# Altium PCB Led_orb.PcbDoc
Units mil, origin at the board's own origin, x right, y up, seen from the top; angles counter-clockwise.
Board outline 2362.2 x 2362.2 mil, 2 copper layers (Top Layer, Bottom Layer), stack 65.792 mil thick; 48 components, 29 nets, 155 pads, 17 vias.
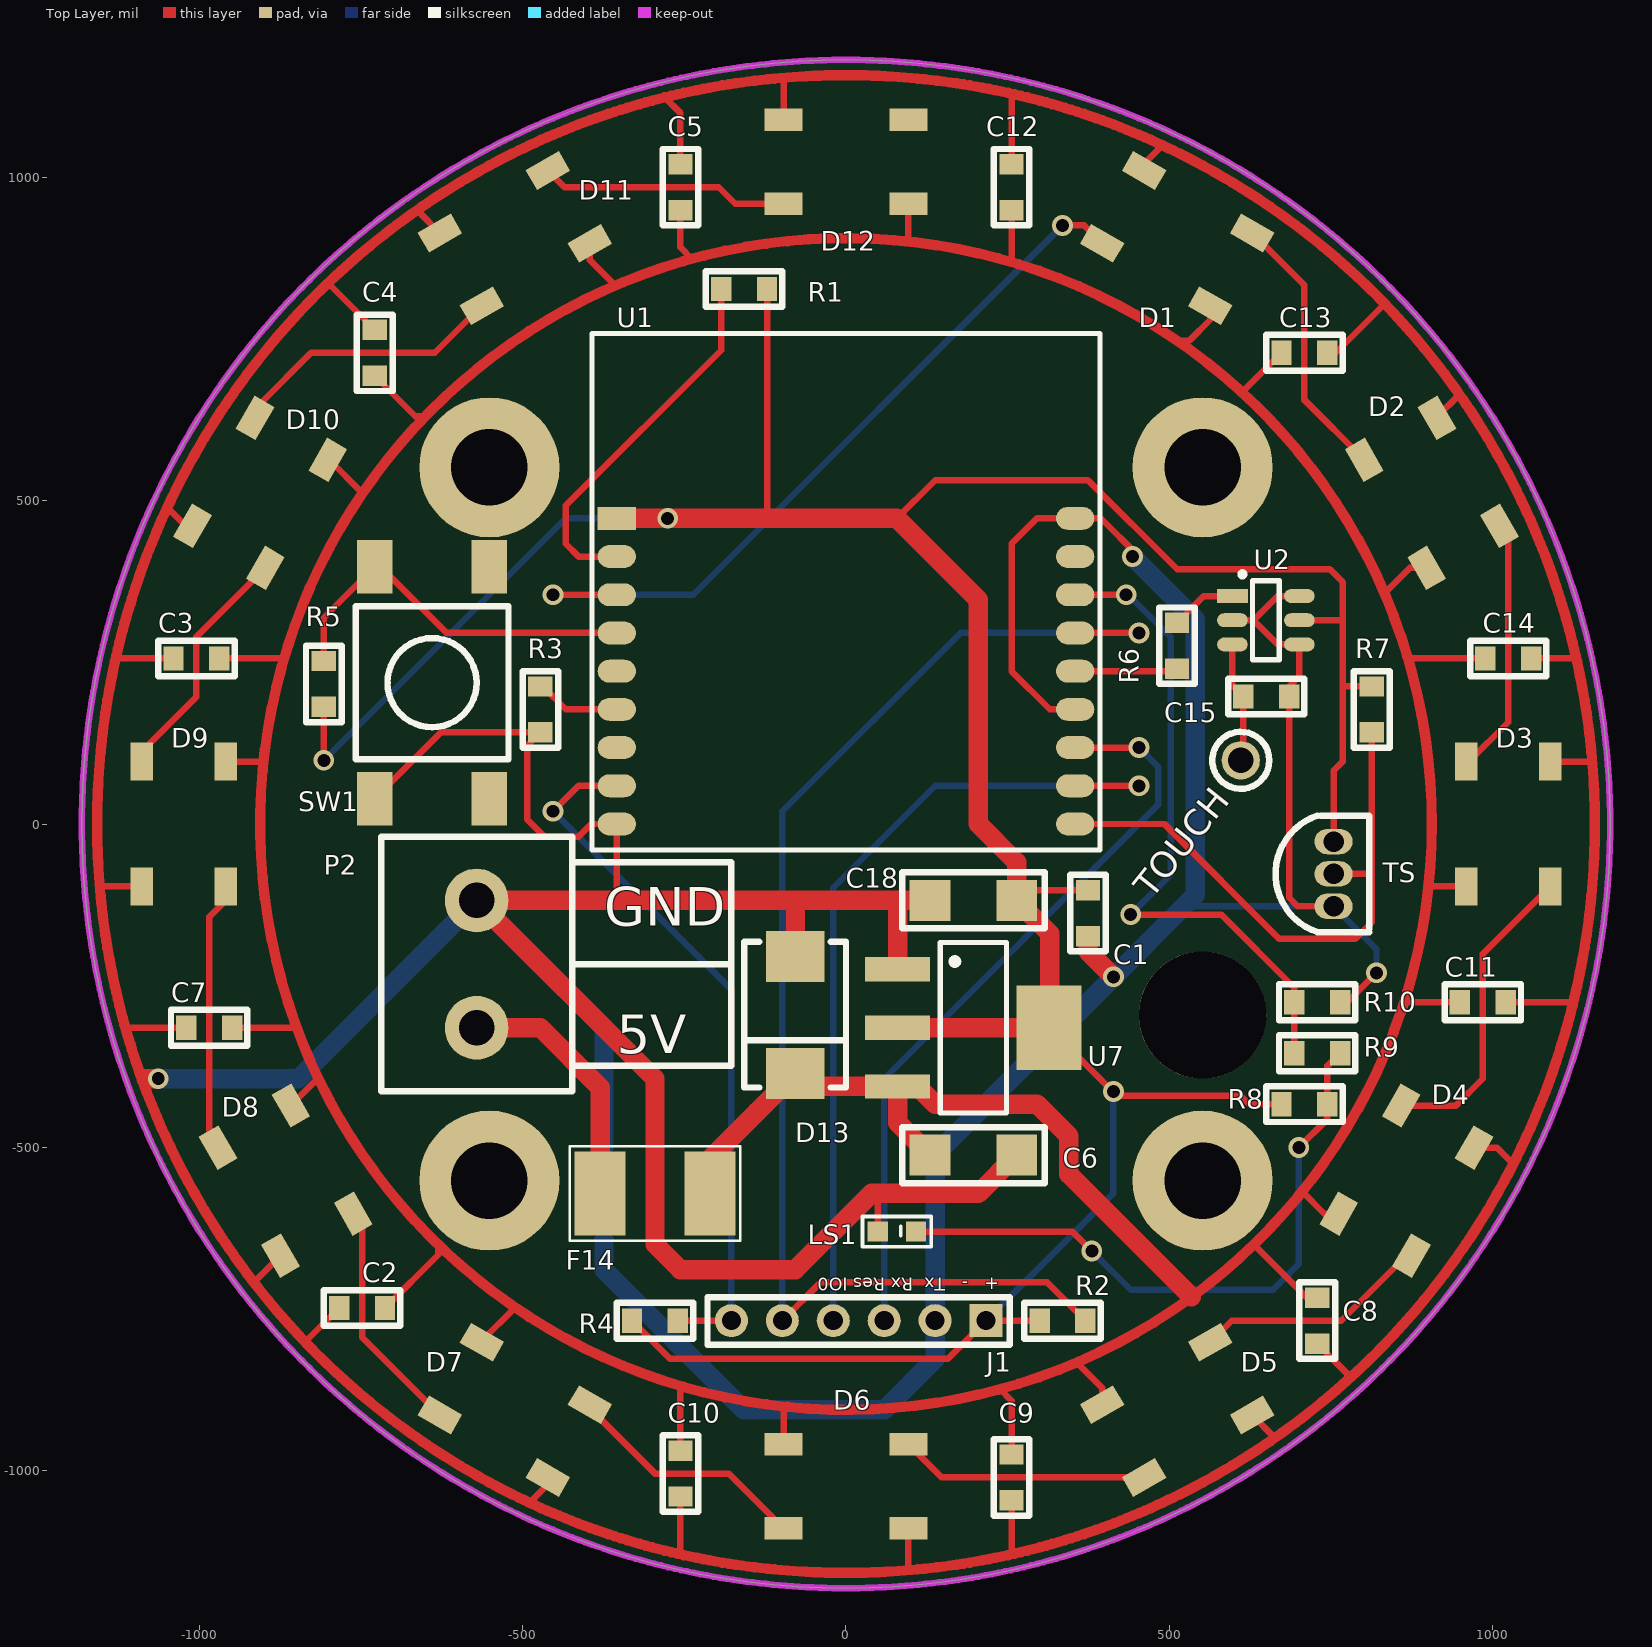
[diagram p0: Top Layer view]
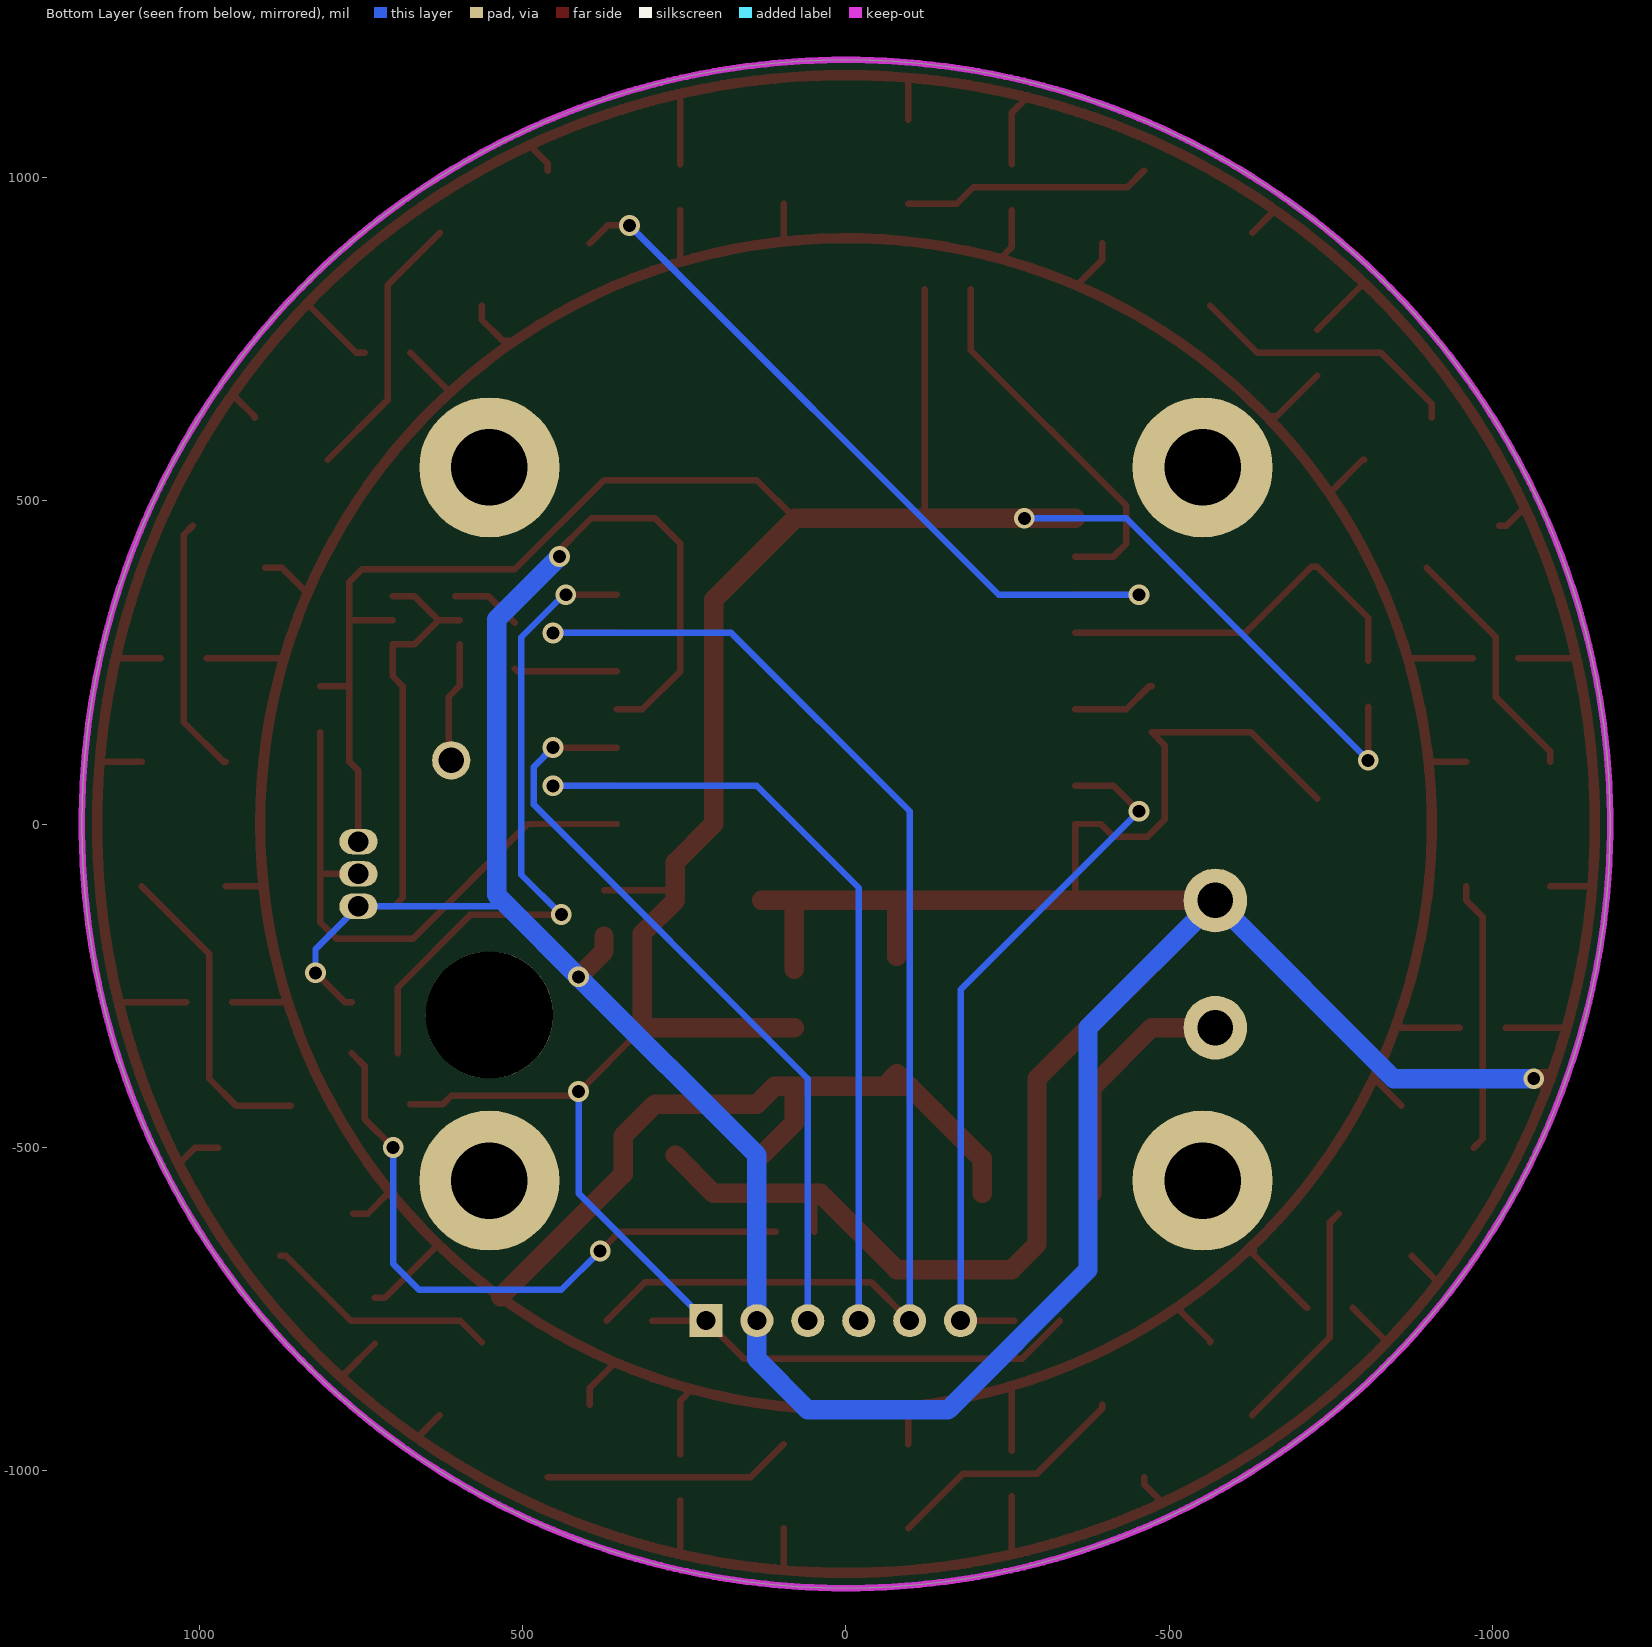
[diagram p1: Bottom Layer view, seen from below]
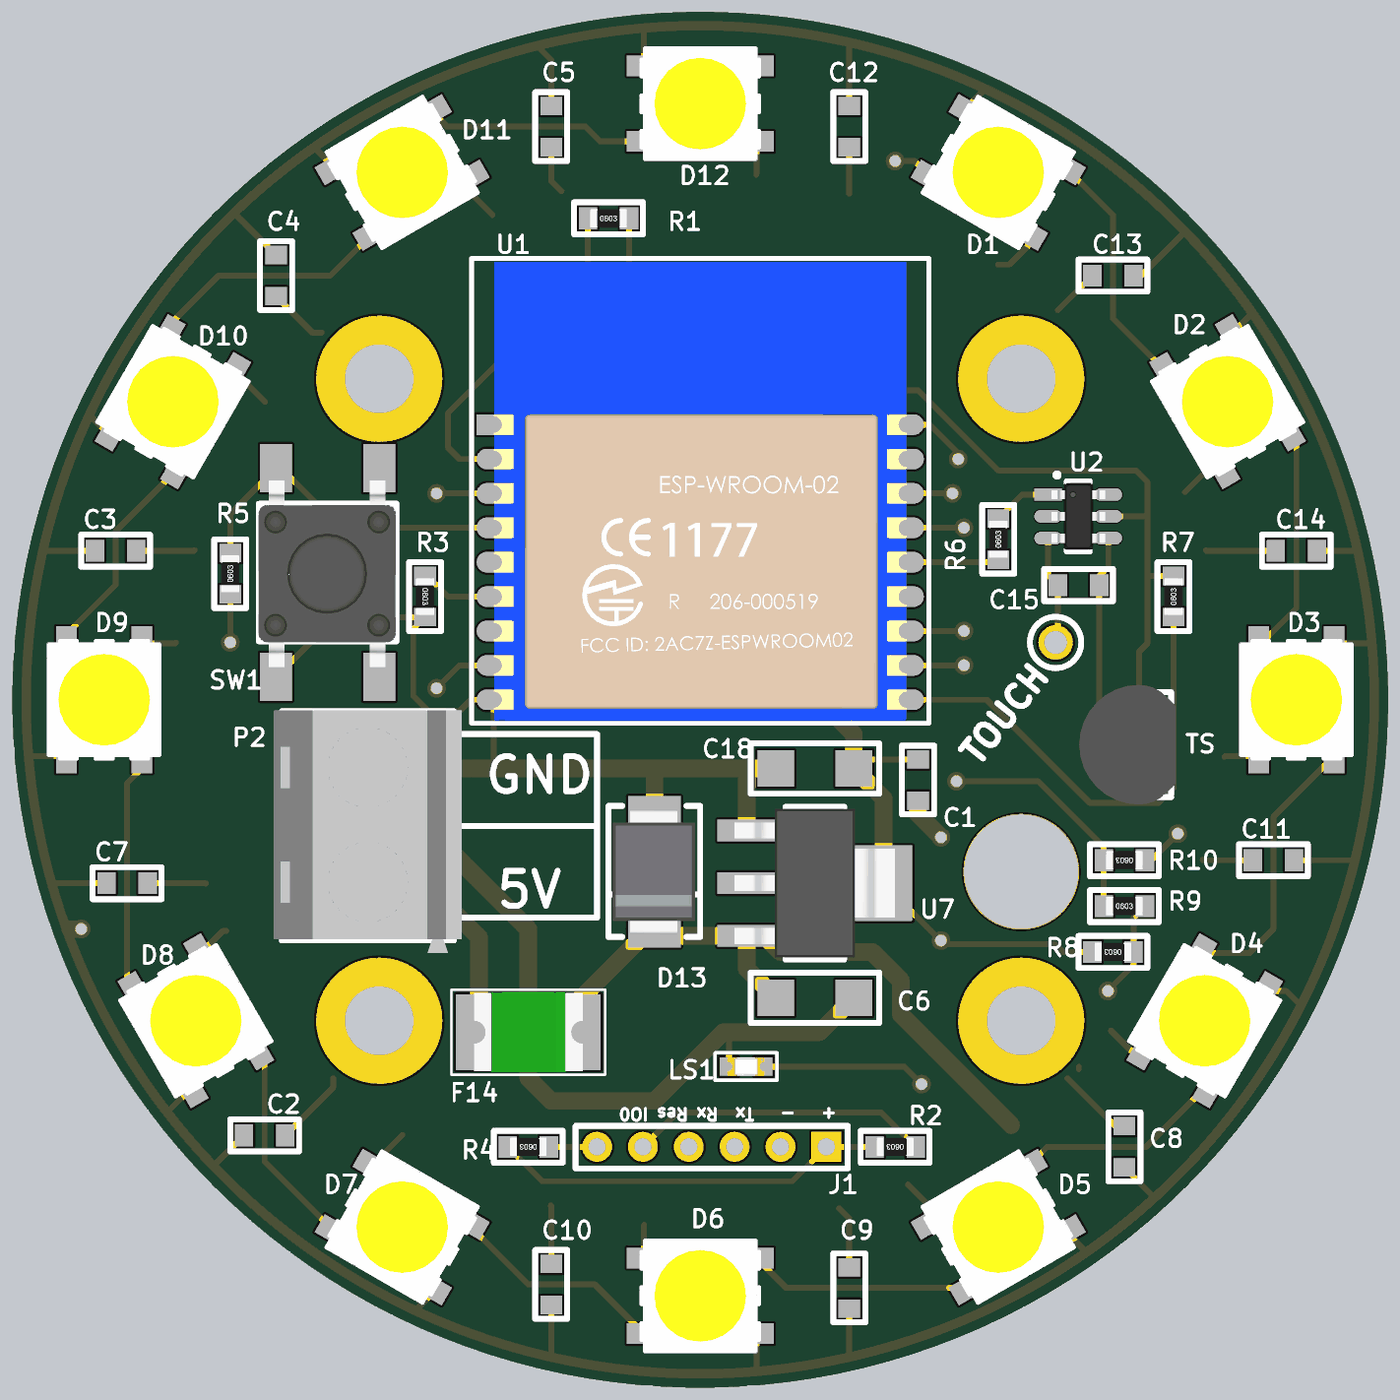
[diagram p2: 3D render of the assembled board from above, using the file's embedded part models]

## Layer stack, top to bottom
Top Solder: solder mask 0.4, Solder Resist, Dk 3.5
Top Layer: signal copper 1.4
Dielectric1: core 62.9921, FR-4, Dk 4.8
Bottom Layer: signal copper 1.4
Bottom Solder: solder mask 0.4, Solder Resist, Dk 3.5

## Board outline
0,-1181.1 cw(c0,0) -1181.1,0 cw(c0,0) 0,1181.1 cw(c0,0) 1181.1,0 cw(c0,0)

## Design rules (kind name [scope] priority, off if disabled: settings)
Clearance Clearance_to_poly [All vs (InNamedPolygon('Bottom GND'))] p1: gap=20
Clearance Clearance_uc [HasFootprint('LQFP64')] p2: gap=4
Clearance [All] p3: gap=9
HoleSize [All] p1: absolutevalues=TRUE maxlimit=236.22 minlimit=0.98 maxpercent=80.000 minpercent=20.000
MinimumSolderMaskSliver MinimumSolderMaskSliver_uc [HasFootprint('LQFP64')     or    HasFootprint('GATE_SOT363') vs HasFootprint('LQFP64')     or    HasFootprint('GATE_SOT363')] p1: minsoldermaskwidth=0
MinimumSolderMaskSliver [All] p2: minsoldermaskwidth=10
PolygonConnect [All] p1: connectstyle=Relief reliefconductorwidth=10 reliefentries=4 polygonreliefangle="90 Angle" airgapwidth=10
RoutingVias [All] p1: holewidth=16 width=32 viastyle="Through Hole" minholewidth=16 minwidth=32 maxholewidth=28 maxwidth=50
SilkToSilkClearance [All] p1: silktosilkclearance=0
SilkToSolderMaskClearance SilkscreenOverComponentPads [IsPad] p1: minsilkscreentomaskgap=0 clearancetoexposedcopper=TRUE
SolderMaskExpansion [All] p1: expansion=4
Width [All] p1: maxlimit=40 minlimit=8 preferedwidth=10
26 further rules are at their usual default settings.

## Components (designator, comment, footprint, x,y, rotation, side; value= is the part's Value field where it differs from the comment)
C1 "100nF" FP_0603_CAP_080 374.02,-137.8 r90 top
C2 "100nF" FP_0603_CAP_080 -748.03,-748.03 r0 top
C3 "100nF" FP_0603_CAP_080 -1003.94,255.91 r0 top
C4 "100nF" FP_0603_CAP_080 -728.35,728.35 r270 top
C5 "100nF" FP_0603_CAP_080 -255.91,984.25 r270 top
C6 "10uF" FP_1206_CAP_085 196.85,-511.81 r180 top
C7 "100nF" FP_0603_CAP_080 -984.25,-314.96 r0 top
C8 "100nF" FP_0603_CAP_080 728.35,-767.72 r90 top
C9 "100nF" FP_0603_CAP_080 255.91,-1010 r90 top
C10 "100nF" FP_0603_CAP_080 -255.91,-1003.94 r90 top
C11 "100nF" FP_0603_CAP_080 984.25,-275.59 r180 top
C12 "100nF" FP_0603_CAP_080 255.91,984.25 r270 top
C13 "100nF" FP_0603_CAP_080 708.66,728.35 r180 top
C14 "100nF" FP_0603_CAP_080 1023.62,255.91 r180 top
C15 "22pF" FP_0603_CAP_080 649.61,196.85 r180 top
C18 "10uF" FP_1206_CAP_085 196.85,-118.11 r0 top
D1 "WS2812B" LED_5050_4pin 511.81,905.51 r150 top
D2 "WS2812B" LED_5050_4pin 905.51,511.81 r120 top
D3 "WS2812B" LED_5050_4pin 1023.62,0 r90 top
D4 "WS2812B" LED_5050_4pin 866.14,-551.18 r60 top
D5 "WS2812B" LED_5050_4pin 511.81,-905.51 r30 top
D6 "WS2812B" LED_5050_4pin 0,-1023.62 r0 top
D7 "WS2812B" LED_5050_4pin -511.81,-905.51 r330 top
D8 "WS2812B" LED_5050_4pin -866.14,-551.18 r300 top
D9 "WS2812B" LED_5050_4pin -1023.62,0 r270 top
D10 "WS2812B" LED_5050_4pin -905.51,511.81 r240 top
D11 "WS2812B" LED_5050_4pin -511.81,905.51 r210 top
D12 "WS2812B" LED_5050_4pin 0,1023.62 r180 top
D13 "SMBJ5.0A suppressor" "FP_SMB DO214AA" -78.74,-295.28 r270 top
F14 "fuse 1.1A" Fuse-Littlefuse-1812 -295.28,-570.87 r270 top
J1 "ESP_PROG_MINI" ESP_PROG_MINI 216.54,-767.72 r180 top
LS1 "ALS-PT19" ALS-PT19 78.74,-629.92 r0 top
P2 "Sorkapocs_2" Sorkapocs_5mm_2P -570.87,-216.54 r270 top
R1 "10k" FP_0603_RES -157.48,826.77 r0 top
R2 "10k" FP_0603_RES 334.65,-767.72 r180 top
R3 "10k" FP_0603_RES -472.44,177.17 r270 top
R4 "10k" FP_0603_RES -295.28,-767.72 r180 top
R5 "1K" FP_0603_RES -807.09,216.54 r90 top
R6 "1K" FP_0603_RES 511.81,275.59 r90 top
R7 "10k" FP_0603_RES 812.72,177.17 r90 top
R8 "10k" FP_0603_RES 708.66,-433.07 r180 top
R9 "220k" FP_0603_RES 728.35,-354.33 r0 top
R10 "100k" FP_0603_RES 728.35,-275.59 r180 top
SW1 "SW_ tactile" FP_TACTBTN -728.35,39.37 r180 top
TS "DS18B20P" SENSOR_TO92 708.66,-177.17 r0 top
U1 "ESP8266_wroom02" ESP8266_wroom02 0,236.22 r0 top
U2 "TTP223E-BA6" SWITCH_SOT23-6 649.61,314.96 r0 top
U7 "LD1117xx" SUPPLY_SOT223 196.85,-314.96 r0 top

## Footprints (in the part's own frame and the unit in brackets; to place one, negate y for a bottom-side part, rotate by r counter-clockwise, add the part's x,y. Pads: shape width x height; smd on the part's side, far side on the other; paste and mask are expansions set on the pad)
ALS-PT19 [mm]
  rect 0.8x0.8 smd: 1(0.75,0) 2(-0.75,0)
  silkscreen extent -1.35,-0.6 1.34,0.6, body extent -0.8,-0.4 0.8,0.4, height 0.6
ESP8266_wroom02 [mm]
  rect 1.5x0.9 smd: 1(-9,6)
  oval 1.5x0.9 smd: 2(-9,4.5) 3(-9,3) 4(-9,1.5) 5(-9,0) 6(-9,-1.5) 7(-9,-3) 8(-9,-4.5) 9(-9,-6) 10(9,-6) 11(9,-4.5) 12(9,-3) 13(9,-1.5) 14(9,0) 15(9,1.5) 16(9,3) 17(9,4.5) 18(9,6)
  silkscreen extent -9.98,-7.02 9.97,13.25, body extent -9,-6.9 9,13.1, height 3
ESP_PROG_MINI [mm]
  rect 1.3x1.3 hole 0.75: 1(0,0)
  round 1.3 hole 0.75: 2(2,0) 3(4,0) 4(6,0) 5(8,0) 6(10,0)
  silkscreen extent -0.94,-0.91 10.94,0.94
FP_0603_CAP_080 [mm] "0.8mm magas 0603 kapacitás"
  rect 0.8x0.95 smd: 1(-0.9,0) 2(0.9,0)
  silkscreen extent -1.5,-0.7 1.5,0.7, body extent -0.8,-0.4 0.76,0.4, height 0.8
FP_0603_RES [mm] "0603 ellenállás"
  rect 0.8x0.95 smd: 1(-0.9,0) 2(0.9,0)
  silkscreen extent -1.5,-0.7 1.5,0.7, body extent -0.8,-0.4 0.8,0.4, height 0.44
FP_1206_CAP_085 [mm] "1206 kapacitás 0.85 mm"
  rect 1.6x1.6 smd: 1(-1.7,0) 2(1.7,0)
  silkscreen extent -2.8,-1.1 2.8,1.1, body extent -1.52,-0.79 1.58,0.79, height 0.85
"FP_SMB DO214AA" [mm] "DO214-AA tok (SMB)"
  rect 2x2.3 smd: A(-2.3,0) K(2.3,0)
  silkscreen extent -2.87,-2 2.84,2, body extent -2.7,-1.83 2.7,1.77, height 2.3
FP_TACTBTN [mm] "TE CONNECTIVITY / ALCOSWITCH - FSM2JSMA"
  rect 1.4x2.1 smd: 1(0,0) 2(0,-9.1) 3(-4.5,0) 4(-4.5,-9.1)
  silkscreen extent -5.25,-7.55 0.75,-1.55, body extent -5.23,-8.57 0.77,-0.42, height 5
Fuse-Littlefuse-1812 [mm]
  rect 3.3x2 smd: 1(0,2.154) 2(0,-2.154)
  silkscreen extent -1.85,-3.35 1.85,3.35, body extent -1.74,-2.36 1.74,2.37, height 1.03
LED_5050_4pin [mm]
  rect 1.5x0.9 smd: 1(-2.45,1.65) 2(-2.45,-1.65) 3(2.45,-1.65) 4(2.45,1.65)
  body extent -2.65,-2.5 2.65,2.5, height 1.6
SENSOR_TO92 [mm] "TO 92, min szélesség"
  oval 1.5x1 hole 0.8: 1(1.143,1.27) 2(1.143,2.54) 3(1.143,3.81)
  silkscreen extent -1.14,0.25 2.54,4.83, body extent -1.47,-0.07 2.73,5.15, height 10
Sorkapocs_5mm_2P [mm]
  round 2.5 hole 1.4: 1(-2.5,0) 2(2.5,0)
  silkscreen extent -5,-3.75 5,3.75, body extent -5.05,-4.1 5.55,4.1, height 10
SUPPLY_SOT223 [mm] "SOT223 package, 3 leads"
  rect 2.55x0.95 smd: 1(-2.975,2.3) 2(-2.975,0) 3(-2.975,-2.3)
  rect 2.55x3.3 smd: 2(2.975,0)
  silkscreen extent -1.3,-3.35 1.3,3.35, body extent -3.5,-3.25 3.5,3.25, height 1.65
SWITCH_SOT23-6 [mm] "SOT23, 5-Leads, Body 2.9x1.6mm, Pitch 0.95mm, Lead Span 2.8mm, IPC Medium Density"
  rect 1.2x0.55 smd mask+0.05: 1(-1.327,0.95)
  oval 1.2x0.55 smd mask+0.05: 2(-1.327,0) 3(-1.327,-0.95) 4(1.3,-0.95) 5(1.3,0) 6(1.3,0.95)
  silkscreen extent -1.01,-1.55 0.51,1.88, body extent -1.17,-1.46 1.17,1.46, height 1

## Part data
C1 C2 C3 C4 C5 C7 C8 C9 C10 C11 C12 C13 C14: library part CAP, "Capacitor"
C6 C18: library part Cap, "Capacitor ceramic X7R"
C15: library part Cap, "Capacitor"
D13: library part "Suppressor diode"
F14: library part FUSE, "fuse"
LS1: "ALS-PT19 Ambient Light Sensor"
P2: library part "Header 1X2", "Header, 2-Pin"
R1 R2 R3 R4 R7 R8 R9 R10: library part Res3, "Resistor"
R5 R6: library part RES, "Resistor"
U1: "ESP8266 WROOM 02 wifi module"
U2: "SOT-23-6 Touch Sensor Controller ICs RoHS"
U7: "LD1117xx 3,3V lin reg"

## Free pads (board coordinates)
  round 216.54 hole 118.11: 0(-551.18,-551.18) 0(-551.18,551.18) 0(551.18,-551.18) 0(551.18,551.18)
  round 196.85 hole 196.85: 0(551.18,-295.28)
  round 59.06 hole 39.37: 1(610.24,98.43)

## Via types
v1: diameter 32, hole 20, Top Layer to Bottom Layer, tented both sides, 17 vias

## Nets (pads, with @x,y where several pads share a name; then routed paths per layer and width w, separated by ;. In a path a pad name is that pad's centre, name@x,y a point inside that pad or via, vN(x,y) a via of type N, cw(c..) or ccw(c..) an arc to the next point about the centre after c; other vN are vias at no path point)
3V3: C1.2 C18.2 J1.1 R1.2 R2.2 R4.2 R5.1 R7.2 R8.2 TS.3 U1.1 U2.5 U7.2 | length 5605.8
  Top Layer w10: v1(-807.09,98.43) R5.1 ; R4.2 -271.65,-826.77 157.48,-826.77 J1.1 R2.2 ; -122.05,476.38 R1.2 ; 78.74,472.44 137.8,531.5 374.02,531.5 511.81,393.7 748.03,393.7 767.72,374.02 767.72,314.96 ; C18.2 279.53,-102.36 C1.2 ; U7.2@313.98,-314.96 419.02,-420 610,-420 623.07,-433.07 R8.2 ; U2.5 767.72,314.96 ; TS.3 753.66,82.52 767.72,96.57 767.72,314.96 ; 771.65,212.6 R7.2
  Top Layer w30: U1.1 78.74,472.44 204.72,346.46 204.72,0 263.78,-59.06 C18.2 314.96,-169.29 314.96,-313.98 313.98,-314.96 U7.2@79.72,-314.96
  Bottom Layer w10: v1(-807.09,98.43) -433.07,472.44 v1(-275.59,472.44) ; J1.1 413.39,-570.87 v1(413.39,-413.39)
5V: C2.2 C3.2 C4.2 C5.2 C6.2 C7.2 C8.2 C9.2 C10.2 C11.2 C12.2 C13.2 C14.2 D1.1 D2.1 D3.1 D4.1 D5.1 D6.1 D7.1 D8.1 D9.1 D10.1 D11.1 D12.1 D13.K F14.1 U7.3 | length 14652.7
  Top Layer w10: C3.2 -869.07,255.91 -868.4,256.57 ; D9.1 -901.6,96.46 -900.21,97.85 ; C7.2 -849.49,-314.96 -848.67,-315.78 ; D8.1 -819.94,-397 -813.85,-397 ; D10.1 -798.86,562.86 -747.33,511.33 ; C4.2 -665.8,630.37 -650.07,630.37 ; C2.2 -630.37,-665.8 -630.37,-650.07 ; D7.1 -562.86,-798.86 -511.33,-747.33 ; D11.1 -395.8,871.39 -356.7,832.3 ; -256.57,-868.4 -255.91,-869.07 C10.2 ; C5.2 -255.91,891.25 -238.26,873.6 ; D6.1 -96.46,-901.6 ; 96.46,901.6 D12.1 ; 238.26,-873.61 255.91,-891.25 C9.2 ; 255.91,869.07 C12.2 ; 356.7,-832.3 395.8,-871.39 D5.1 ; 511.33,747.33 530.79,747.33 562.86,779.4 D1.1 ; 614.01,669.13 C13.2 ; 630.37,-650.07 712.58,-732.28 C8.2 ; 650.07,-634.32 650.07,-630.37 ; 705.17,-568.05 739.35,-602.23 D4.1 ; 832.3,356.7 871.39,395.8 D2.1 ; 862.89,-274.55 863.92,-275.59 C11.2 ; 868.4,256.57 869.07,255.91 C14.2 ; 900.21,-97.85 901.6,-96.46 D3.1
  Top Layer w16: 905.51,0 ccw(c0,0) 905.51,0 ; 905.51,0 ccw(c0,0) 905.51,0
  Top Layer w30: F14.1 -210.47,-517.56 -137.8,-444.88 D13.K@-98.43,-405.51 ; C6.2 79.72,-461.61 U7.3 ; 533.77,-730.62 344.49,-541.34 344.49,-482.28 295.28,-433.07 137.8,-433.07 110.24,-405.51 U7.3 ; D13.K@-98.43,-405.51 D13.K@-59.06,-405.51 ; D13.K@-98.43,-405.51 D13.K D13.K@-59.06,-405.51 ; D13.K@-59.06,-405.51 U7.3
A/D: R9.1 R10.2 U1.16 | length 1030
  Top Layer w10: U1.16 v1(433.07,354.33) ; v1(440,-140) 580,-140 692.91,-252.91 R9.1
  Bottom Layer w10: v1(433.07,354.33) 436.13,354.33 501.76,288.7 501.76,-78.24 v1(440,-140)
BTN: R5.2 SW1.2 U1.4 | length 594.7
  Top Layer w10: R5.2 -807.09,318.9 SW1.2 -719.49,397.64 -617.13,295.28 U1.4
GND: C1.1 C2.1 C3.1 C4.1 C5.1 C6.1 C7.1 C8.1 C9.1 C10.1 C11.1 C12.1 C13.1 C14.1 C15.1 C18.1 D1.3 D2.3 D3.3 D4.3 D5.3 D6.3 D7.3 D8.3 D9.3 D10.3 D11.3 D12.3 D13.A J1.2 LS1.2 P2.1 R3.2 R10.1 SW1.1 TS.1 U1.9 U1.13 U1.18 U2.2 U2.4 U2.6 U7.1 | length 17864.4
  Top Layer w10: -1153.08,-100.88 -1148.65,-96.46 D9.3 ; -1127.81,260.38 -1123.34,255.91 C3.1 ; -1112.64,-319.04 -1108.56,-314.96 C7.1 ; -1049.03,489.17 -1020.62,460.76 D10.3 ; -912.11,-712.62 -912.11,-705.13 D8.3 ; -832.62,-804.05 -832.62,-797.19 C2.1 ; -804.05,832.62 -797.19,832.62 C4.1 ; SW1.1 -625.98,141.73 R3.2 -492.76,121.42 -492.76,6.94 -466.13,-19.69 -413.39,-19.69 -393.7,0 U1.9 -354.33,-118.11 ; -663.9,948.15 -662.44,948.15 D11.3 ; -489.17,-1049.03 -460.76,-1020.62 D7.3 ; -280.02,1123.1 -255.91,1098.98 C5.1 ; -257.38,-1128.5 -255.91,-1127.03 C10.1 ; -100.88,1153.08 -96.46,1148.65 D12.3 ; 39.37,-570.87 49.21,-580.71 LS1.2 ; D6.3 96.46,-1148.65 100.88,-1153.08 ; C9.1 255.91,-1123.34 260.38,-1127.81 ; C12.1 255.91,1123.34 ; U1.13 314.96,177.17 255.91,236.22 255.91,433.07 295.28,472.44 393.7,472.44 452.76,413.39 v1(442.91,413.39) ; D1.3 460.76,1020.62 489.17,1049.03 ; U2.2 629.92,314.96 ; D5.3 662.44,-948.15 663.9,-948.15 ; U2.6 667.32,352.36 629.92,314.96 ; C8.1 774.51,-849.31 774.51,-860.18 ; C13.1 756.91,728.35 832.62,804.05 ; TS.1 698.03,-127.17 685.04,-114.17 C15.1 685.04,212.6 700.79,228.35 U2.4 667.32,277.56 629.92,314.96 ; R10.1 774.41,-275.59 v1(820,-230) ; D2.3 913.54,629.29 948.15,663.9 ; D4.3 1005.96,-500.13 1031.32,-525.49 ; C11.1 1118.67,-275.59 ; C14.1 1123.34,255.91 ; D3.3 1148.65,96.46 1153.08,100.88
  Top Layer w16: -1154.66,-80.74 ccw(c0,0) -1153.08,-100.88 ; -1154.66,-80.74 cw(c0,0) -1155.89,-60.58 cw(c0,0) -1156.78,-40.4 cw(c0,0) -1157.3,-20.2 cw(c0,0) -1157.48,0 cw(c0,0) -1157.3,20.2 cw(c0,0) -1156.78,40.4 cw(c0,0) -1155.89,60.58 cw(c0,0) -1154.66,80.74 cw(c0,0) -1153.08,100.88 cw(c0,0) -1151.14,120.99 cw(c0,0) -1148.85,141.06 cw(c0,0) -1146.22,161.09 cw(c0,0) -1143.23,181.07 cw(c0,0) -1139.9,200.99 cw(c0,0) -1136.21,220.86 cw(c0,0) -1132.19,240.65 ; -1154.66,-80.74 ccw(c0,0) -1153.08,-100.88 ; -1153.08,-100.88 ccw(c0,0) -1151.14,-120.99 ; -1153.08,-100.88 ccw(c0,0) -1151.14,-120.99 ; -1151.14,-120.99 ccw(c0,0) -1148.85,-141.06 ccw(c0,0) -1146.22,-161.09 ccw(c0,0) -1143.23,-181.07 ccw(c0,0) -1139.9,-200.99 ccw(c0,0) -1136.21,-220.86 ccw(c0,0) -1132.19,-240.65 ccw(c0,0) -1127.81,-260.38 ccw(c0,0) -1123.1,-280.02 ccw(c0,0) -1118.04,-299.58 ; -1132.19,240.65 cw(c0,0) -1127.81,260.38 ; -1132.19,240.65 cw(c0,0) -1127.81,260.38 ; -1127.81,260.38 cw(c0,0) -1123.1,280.02 ; -1127.81,260.38 cw(c0,0) -1123.1,280.02 ; -1123.1,280.02 cw(c0,0) -1118.04,299.58 cw(c0,0) -1112.64,319.04 cw(c0,0) -1106.9,338.41 cw(c0,0) -1100.83,357.68 cw(c0,0) -1094.42,376.84 cw(c0,0) -1087.68,395.88 cw(c0,0) -1080.6,414.8 cw(c0,0) -1073.2,433.6 cw(c0,0) -1065.47,452.26 cw(c0,0) -1057.41,470.79 ; -1118.04,-299.58 ccw(c0,0) -1112.64,-319.04 ; -1118.04,-299.58 ccw(c0,0) -1112.64,-319.04 ; -1112.64,-319.04 ccw(c0,0) -1106.9,-338.41 ; -1112.64,-319.04 ccw(c0,0) -1106.9,-338.41 ; -1106.9,-338.41 ccw(c0,0) -1100.83,-357.68 ccw(c0,0) -1094.42,-376.84 ccw(c0,0) -1087.68,-395.88 ccw(c0,0) -1080.6,-414.8 ccw(c0,0) -1073.2,-433.6 ccw(c0,0) -1065.47,-452.26 ccw(c0,0) -1057.41,-470.79 ccw(c0,0) -1049.03,-489.17 ccw(c0,0) -1040.34,-507.41 ccw(c0,0) -1031.32,-525.49 ccw(c0,0) -1021.99,-543.4 ccw(c0,0) -1012.36,-561.16 ccw(c0,0) -1002.41,-578.74 ccw(c0,0) -992.15,-596.15 ccw(c0,0) -981.6,-613.37 ccw(c0,0) -970.74,-630.41 ccw(c0,0) -959.59,-647.25 ccw(c0,0) -948.15,-663.9 ccw(c0,0) -936.42,-680.35 ccw(c0,0) -924.4,-696.59 ; -1057.41,470.79 cw(c0,0) -1049.03,489.17 ; -1057.41,470.79 cw(c0,0) -1049.03,489.17 ; -1049.03,489.17 cw(c0,0) -1040.34,507.41 ; -1049.03,489.17 cw(c0,0) -1040.34,507.41 ; -1040.34,507.41 cw(c0,0) -1031.32,525.49 cw(c0,0) -1021.99,543.4 cw(c0,0) -1012.36,561.16 cw(c0,0) -1002.41,578.74 cw(c0,0) -992.15,596.15 cw(c0,0) -981.6,613.37 cw(c0,0) -970.74,630.41 cw(c0,0) -959.59,647.25 cw(c0,0) -948.15,663.9 cw(c0,0) -936.42,680.35 cw(c0,0) -924.4,696.59 cw(c0,0) -912.11,712.62 cw(c0,0) -899.53,728.43 cw(c0,0) -886.68,744.01 cw(c0,0) -873.56,759.38 cw(c0,0) -860.18,774.51 cw(c0,0) -846.53,789.4 cw(c0,0) -832.62,804.05 cw(c0,0) -818.46,818.46 ; -924.4,-696.59 ccw(c0,0) -912.11,-712.62 ; -924.4,-696.59 ccw(c0,0) -912.11,-712.62 ; -912.11,-712.62 ccw(c0,0) -899.53,-728.43 ; -912.11,-712.62 ccw(c0,0) -899.53,-728.43 ; -899.53,-728.43 ccw(c0,0) -886.68,-744.01 ccw(c0,0) -873.56,-759.38 ccw(c0,0) -860.18,-774.51 ccw(c0,0) -846.53,-789.4 ; -846.53,-789.4 ccw(c0,0) -832.62,-804.05 ; -846.53,-789.4 ccw(c0,0) -832.62,-804.05 ; -832.62,-804.05 ccw(c0,0) -818.46,-818.46 ; -832.62,-804.05 ccw(c0,0) -818.46,-818.46 ; -818.46,-818.46 ccw(c0,0) -804.05,-832.62 ccw(c0,0) -789.4,-846.53 ccw(c0,0) -774.51,-860.18 ccw(c0,0) -759.38,-873.56 ccw(c0,0) -744.01,-886.68 ccw(c0,0) -728.43,-899.53 ccw(c0,0) -712.62,-912.11 ccw(c0,0) -696.59,-924.4 ccw(c0,0) -680.35,-936.42 ccw(c0,0) -663.9,-948.15 ccw(c0,0) -647.25,-959.59 ccw(c0,0) -630.41,-970.74 ccw(c0,0) -613.37,-981.6 ccw(c0,0) -596.15,-992.15 ccw(c0,0) -578.74,-1002.41 ccw(c0,0) -561.16,-1012.36 ccw(c0,0) -543.4,-1021.99 ccw(c0,0) -525.49,-1031.32 ccw(c0,0) -507.41,-1040.34 ccw(c0,0) -489.17,-1049.03 ccw(c0,0) -470.79,-1057.41 ccw(c0,0) -452.26,-1065.47 ccw(c0,0) -433.6,-1073.2 ccw(c0,0) -414.8,-1080.6 ccw(c0,0) -395.88,-1087.68 ccw(c0,0) -376.84,-1094.42 ccw(c0,0) -357.68,-1100.83 ccw(c0,0) -338.41,-1106.9 ccw(c0,0) -319.04,-1112.64 ccw(c0,0) -299.58,-1118.04 ccw(c0,0) -280.02,-1123.1 ccw(c0,0) -260.38,-1127.81 ccw(c0,0) -240.65,-1132.19 ccw(c0,0) -220.86,-1136.21 ccw(c0,0) -200.99,-1139.9 ccw(c0,0) -181.07,-1143.23 ccw(c0,0) -161.09,-1146.22 ccw(c0,0) -141.06,-1148.85 ccw(c0,0) -120.99,-1151.14 ccw(c0,0) -100.88,-1153.08 ccw(c0,0) -80.74,-1154.66 ccw(c0,0) -60.58,-1155.89 ccw(c0,0) -40.4,-1156.78 ccw(c0,0) -20.2,-1157.3 ccw(c0,0) 0,-1157.48 ccw(c0,0) 20.2,-1157.3 ccw(c0,0) 40.4,-1156.78 ccw(c0,0) 60.58,-1155.89 ccw(c0,0) 80.74,-1154.66 ; -818.46,818.46 cw(c0,0) -804.05,832.62 ; -818.46,818.46 cw(c0,0) -804.05,832.62 ; -804.05,832.62 cw(c0,0) -789.4,846.53 ; -804.05,832.62 cw(c0,0) -789.4,846.53 ; -789.4,846.53 cw(c0,0) -774.51,860.18 cw(c0,0) -759.38,873.56 cw(c0,0) -744.01,886.68 cw(c0,0) -728.43,899.53 cw(c0,0) -712.62,912.11 cw(c0,0) -696.59,924.4 cw(c0,0) -680.35,936.42 ; -680.35,936.42 cw(c0,0) -663.9,948.15 ; -680.35,936.42 cw(c0,0) -663.9,948.15 ; -663.9,948.15 cw(c0,0) -647.25,959.59 ; -663.9,948.15 cw(c0,0) -647.25,959.59 ; -647.25,959.59 cw(c0,0) -630.41,970.74 cw(c0,0) -613.37,981.6 cw(c0,0) -596.15,992.15 cw(c0,0) -578.74,1002.41 cw(c0,0) -561.16,1012.36 cw(c0,0) -543.4,1021.99 cw(c0,0) -525.49,1031.32 cw(c0,0) -507.41,1040.34 cw(c0,0) -489.17,1049.03 cw(c0,0) -470.79,1057.41 cw(c0,0) -452.26,1065.47 cw(c0,0) -433.6,1073.2 cw(c0,0) -414.8,1080.6 cw(c0,0) -395.88,1087.68 cw(c0,0) -376.84,1094.42 cw(c0,0) -357.68,1100.83 cw(c0,0) -338.41,1106.9 cw(c0,0) -319.04,1112.64 cw(c0,0) -299.58,1118.04 cw(c0,0) -280.02,1123.1 cw(c0,0) -260.38,1127.81 cw(c0,0) -240.65,1132.19 cw(c0,0) -220.86,1136.21 cw(c0,0) -200.99,1139.9 cw(c0,0) -181.07,1143.23 cw(c0,0) -161.09,1146.22 cw(c0,0) -141.06,1148.85 cw(c0,0) -120.99,1151.14 ; -120.99,1151.14 cw(c0,0) -100.88,1153.08 ; -120.99,1151.14 cw(c0,0) -100.88,1153.08 ; -100.88,1153.08 cw(c0,0) -80.74,1154.66 ; -100.88,1153.08 cw(c0,0) -80.74,1154.66 ; -80.74,1154.66 cw(c0,0) -60.58,1155.89 cw(c0,0) -40.4,1156.78 cw(c0,0) -20.2,1157.3 cw(c0,0) 0,1157.48 cw(c0,0) 20.2,1157.3 cw(c0,0) 40.4,1156.78 cw(c0,0) 60.58,1155.89 cw(c0,0) 80.74,1154.66 cw(c0,0) 100.88,1153.08 cw(c0,0) 120.99,1151.14 cw(c0,0) 141.06,1148.85 cw(c0,0) 161.09,1146.22 cw(c0,0) 181.07,1143.23 cw(c0,0) 200.99,1139.9 cw(c0,0) 220.86,1136.21 cw(c0,0) 240.65,1132.19 cw(c0,0) 260.38,1127.81 cw(c0,0) 280.02,1123.1 cw(c0,0) 299.58,1118.04 cw(c0,0) 319.04,1112.64 cw(c0,0) 338.41,1106.9 cw(c0,0) 357.68,1100.83 cw(c0,0) 376.84,1094.42 cw(c0,0) 395.88,1087.68 cw(c0,0) 414.8,1080.6 cw(c0,0) 433.6,1073.2 cw(c0,0) 452.26,1065.47 cw(c0,0) 470.79,1057.41 ; 80.74,-1154.66 ccw(c0,0) 100.88,-1153.08 ; 80.74,-1154.66 ccw(c0,0) 100.88,-1153.08 ; 100.88,-1153.08 ccw(c0,0) 120.99,-1151.14 ; 100.88,-1153.08 ccw(c0,0) 120.99,-1151.14 ; 120.99,-1151.14 ccw(c0,0) 141.06,-1148.85 ccw(c0,0) 161.09,-1146.22 ccw(c0,0) 181.07,-1143.23 ccw(c0,0) 200.99,-1139.9 ccw(c0,0) 220.86,-1136.21 ccw(c0,0) 240.65,-1132.19 ; 240.65,-1132.19 ccw(c0,0) 260.38,-1127.81 ; 240.65,-1132.19 ccw(c0,0) 260.38,-1127.81 ; 260.38,-1127.81 ccw(c0,0) 280.02,-1123.1 ; 260.38,-1127.81 ccw(c0,0) 280.02,-1123.1 ; 280.02,-1123.1 ccw(c0,0) 299.58,-1118.04 ccw(c0,0) 319.04,-1112.64 ccw(c0,0) 338.41,-1106.9 ccw(c0,0) 357.68,-1100.83 ccw(c0,0) 376.84,-1094.42 ccw(c0,0) 395.88,-1087.68 ccw(c0,0) 414.8,-1080.6 ccw(c0,0) 433.6,-1073.2 ccw(c0,0) 452.26,-1065.47 ccw(c0,0) 470.79,-1057.41 ccw(c0,0) 489.17,-1049.03 ccw(c0,0) 507.41,-1040.34 ccw(c0,0) 525.49,-1031.32 ccw(c0,0) 543.4,-1021.99 ccw(c0,0) 561.16,-1012.36 ccw(c0,0) 578.74,-1002.41 ccw(c0,0) 596.15,-992.15 ccw(c0,0) 613.37,-981.6 ccw(c0,0) 630.41,-970.74 ccw(c0,0) 647.25,-959.59 ; 470.79,1057.41 cw(c0,0) 489.17,1049.03 ; 470.79,1057.41 cw(c0,0) 489.17,1049.03 ; 489.17,1049.03 cw(c0,0) 507.41,1040.34 ; 489.17,1049.03 cw(c0,0) 507.41,1040.34 ; 507.41,1040.34 cw(c0,0) 525.49,1031.32 cw(c0,0) 543.4,1021.99 cw(c0,0) 561.16,1012.36 cw(c0,0) 578.74,1002.41 cw(c0,0) 596.15,992.15 cw(c0,0) 613.37,981.6 cw(c0,0) 630.41,970.74 cw(c0,0) 647.25,959.59 cw(c0,0) 663.9,948.15 cw(c0,0) 680.35,936.42 cw(c0,0) 696.59,924.4 cw(c0,0) 712.62,912.11 cw(c0,0) 728.43,899.53 cw(c0,0) 744.01,886.68 cw(c0,0) 759.38,873.56 cw(c0,0) 774.51,860.18 cw(c0,0) 789.4,846.53 cw(c0,0) 804.05,832.62 cw(c0,0) 818.46,818.46 ; 647.25,-959.59 ccw(c0,0) 663.9,-948.15 ; 647.25,-959.59 ccw(c0,0) 663.9,-948.15 ; 663.9,-948.15 ccw(c0,0) 680.35,-936.42 ; 663.9,-948.15 ccw(c0,0) 680.35,-936.42 ; 680.35,-936.42 ccw(c0,0) 696.59,-924.4 ccw(c0,0) 712.62,-912.11 ccw(c0,0) 728.43,-899.53 ccw(c0,0) 744.01,-886.68 ccw(c0,0) 759.38,-873.56 ; 759.38,-873.56 ccw(c0,0) 774.51,-860.18 ; 759.38,-873.56 ccw(c0,0) 774.51,-860.18 ; 774.51,-860.18 ccw(c0,0) 789.4,-846.53 ; 774.51,-860.18 ccw(c0,0) 789.4,-846.53 ; 789.4,-846.53 ccw(c0,0) 804.05,-832.62 ccw(c0,0) 818.46,-818.46 ccw(c0,0) 832.62,-804.05 ccw(c0,0) 846.53,-789.4 ccw(c0,0) 860.18,-774.51 ccw(c0,0) 873.56,-759.38 ccw(c0,0) 886.68,-744.01 ccw(c0,0) 899.53,-728.43 ccw(c0,0) 912.11,-712.62 ccw(c0,0) 924.4,-696.59 ccw(c0,0) 936.42,-680.35 ccw(c0,0) 948.15,-663.9 ccw(c0,0) 959.59,-647.25 ccw(c0,0) 970.74,-630.41 ccw(c0,0) 981.6,-613.37 ccw(c0,0) 992.15,-596.15 ccw(c0,0) 1002.41,-578.74 ccw(c0,0) 1012.36,-561.16 ccw(c0,0) 1021.99,-543.4 ; 818.46,818.46 cw(c0,0) 832.62,804.05 ; 818.46,818.46 cw(c0,0) 832.62,804.05 ; 832.62,804.05 cw(c0,0) 846.53,789.4 ; 832.62,804.05 cw(c0,0) 846.53,789.4 ; 846.53,789.4 cw(c0,0) 860.18,774.51 cw(c0,0) 873.56,759.38 cw(c0,0) 886.68,744.01 cw(c0,0) 899.53,728.43 cw(c0,0) 912.11,712.62 cw(c0,0) 924.4,696.59 cw(c0,0) 936.42,680.35 ; 936.42,680.35 cw(c0,0) 948.15,663.9 ; 936.42,680.35 cw(c0,0) 948.15,663.9 ; 948.15,663.9 cw(c0,0) 959.59,647.25 ; 948.15,663.9 cw(c0,0) 959.59,647.25 ; 959.59,647.25 cw(c0,0) 970.74,630.41 cw(c0,0) 981.6,613.37 cw(c0,0) 992.15,596.15 cw(c0,0) 1002.41,578.74 cw(c0,0) 1012.36,561.16 cw(c0,0) 1021.99,543.4 cw(c0,0) 1031.32,525.49 cw(c0,0) 1040.34,507.41 cw(c0,0) 1049.03,489.17 cw(c0,0) 1057.41,470.79 cw(c0,0) 1065.47,452.26 cw(c0,0) 1073.2,433.6 cw(c0,0) 1080.6,414.8 cw(c0,0) 1087.68,395.88 cw(c0,0) 1094.42,376.84 cw(c0,0) 1100.83,357.68 cw(c0,0) 1106.9,338.41 cw(c0,0) 1112.64,319.04 cw(c0,0) 1118.04,299.58 cw(c0,0) 1123.1,280.02 cw(c0,0) 1127.81,260.38 cw(c0,0) 1132.19,240.65 cw(c0,0) 1136.21,220.86 cw(c0,0) 1139.9,200.99 cw(c0,0) 1143.23,181.07 cw(c0,0) 1146.22,161.09 cw(c0,0) 1148.85,141.06 cw(c0,0) 1151.14,120.99 ; 1021.99,-543.4 ccw(c0,0) 1031.32,-525.49 ; 1021.99,-543.4 ccw(c0,0) 1031.32,-525.49 ; 1031.32,-525.49 ccw(c0,0) 1040.34,-507.41 ; 1031.32,-525.49 ccw(c0,0) 1040.34,-507.41 ; 1040.34,-507.41 ccw(c0,0) 1049.03,-489.17 ccw(c0,0) 1057.41,-470.79 ccw(c0,0) 1065.47,-452.26 ccw(c0,0) 1073.2,-433.6 ccw(c0,0) 1080.6,-414.8 ccw(c0,0) 1087.68,-395.88 ccw(c0,0) 1094.42,-376.84 ccw(c0,0) 1100.83,-357.68 ccw(c0,0) 1106.9,-338.41 ccw(c0,0) 1112.64,-319.04 ccw(c0,0) 1118.04,-299.58 ccw(c0,0) 1123.1,-280.02 ccw(c0,0) 1127.81,-260.38 ccw(c0,0) 1132.19,-240.65 ccw(c0,0) 1136.21,-220.86 ccw(c0,0) 1139.9,-200.99 ccw(c0,0) 1143.23,-181.07 ccw(c0,0) 1146.22,-161.09 ccw(c0,0) 1148.85,-141.06 ccw(c0,0) 1151.14,-120.99 ccw(c0,0) 1153.08,-100.88 ccw(c0,0) 1154.66,-80.74 ccw(c0,0) 1155.89,-60.58 ccw(c0,0) 1156.78,-40.4 ccw(c0,0) 1157.3,-20.2 ccw(c0,0) 1157.48,0 ccw(c0,0) 1157.3,20.2 ccw(c0,0) 1156.78,40.4 ccw(c0,0) 1155.89,60.58 ccw(c0,0) 1154.66,80.74 ; 1151.14,120.99 cw(c0,0) 1153.08,100.88 ; 1151.14,120.99 cw(c0,0) 1153.08,100.88 ; 1153.08,100.88 cw(c0,0) 1154.66,80.74 ; 1153.08,100.88 cw(c0,0) 1154.66,80.74
  Top Layer w30: -1081.69,-393.7 v1(-1062.99,-393.7) ; P2.1 -295.28,-393.7 -295.28,-649.61 -255.91,-688.98 -78.74,-688.98 39.37,-570.87 204.72,-570.87 C6.1 ; P2.1@-531.5,-118.11 -78.74,-118.11 ; D13.A -78.74,-118.11 ; U7.1 79.72,-119.09 ; C18.1 -78.74,-118.11 ; C1.1 374.02,-196.85 v1(413.39,-236.22)
  Bottom Layer w10: 522.44,-127.17 TS.1 820,-193.5 v1(820,-230)
  Bottom Layer w30: v1(-1062.99,-393.7) -846.46,-393.7 P2.1 -374.02,-314.96 -374.02,-688.98 -157.48,-905.51 59.06,-905.51 137.8,-826.77 J1.2 137.8,-511.81 v1(413.39,-236.22) 522.44,-127.17 540,-109.61 540,316.3 v1(442.91,413.39)
INPUT: R6.1 U1.14 | length 240.9
  Top Layer w10: 436.13,236.22 U1.14 507.87,236.22 R6.1
IO0: J1.6 R4.1 U1.8 | length 1099
  Top Layer w10: v1(-452.76,19.68) -413.39,59.06 U1.8 ; R4.1 J1.6
  Bottom Layer w10: v1(-452.76,19.68) -177.17,-255.91 J1.6
LED: D1.4 U1.3 | length 1194.9
  Top Layer w10: v1(-452.76,354.33) U1.3 ; v1(334.65,925.2) 368.08,925.2 D1.4
  Bottom Layer w10: v1(-452.76,354.33) -236.22,354.33 v1(334.65,925.2)
NetD1_2: D1.2 D2.4 | length 422.4
  Top Layer w10: D1.2 708.66,832.7 708.66,655.23 D2.4
NetD2_2: D2.2 D3.4 | length 399.2
  Top Layer w10: D3.4 962.6,96.46 1023.62,157.48 1023.62,447.13 D2.2
NetD3_2: D3.2 D4.4 | length 483.8
  Top Layer w10: D4.4 942.79,-435.17 984.25,-393.7 984.25,-200.79 D3.2
NetD4_2: D4.2 D5.4 | length 366.7
  Top Layer w10: D5.4 596.17,-767.72 765.62,-767.72 866.14,-667.2 D4.2
NetD5_2: D5.2 D6.4 | length 385.6
  Top Layer w10: D6.4 147.79,-1010 D5.2
NetD6_2: D6.2 D7.4 | length 382
  Top Layer w10: D7.4 -395.8,-903.42 -295.28,-1003.94 -181.1,-1003.94 D6.2
NetD7_2: D7.2 D8.4 | length 366.7
  Top Layer w10: D8.4 -748.03,-615.86 -748.03,-793.33 D7.2
NetD8_2: D8.2 D9.4 | length 419.9
  Top Layer w10: D8.2 -984.25,-486.5 -984.25,-143.7 -958.66,-118.11 D9.4
NetD9_2: D9.2 D10.4 | length 378.5
  Top Layer w10: D9.2 -1088.58,112.2 -1003.94,196.85 -1003.94,289.34 D10.4
NetD10_2: D10.2 D11.4 | length 427.1
  Top Layer w10: D10.2@-905.51,627.83 -905.51,649.61 -826.77,728.35 -635.54,728.35 D11.4
NetD11_2: D11.2 D12.4 | length 385.6
  Top Layer w10: D11.2 -435.01,984.25 -196.85,984.25 -171.26,958.66 D12.4
NetF14_2: F14.2 P2.2 | length 392.6
  Top Layer w30: P2.2 -472.44,-314.96 -380.08,-407.32 F14.2
NetLS1_1: LS1.1 R8.1 R9.2 | length 997.7
  Top Layer w10: LS1.1 349.92,-629.92 v1(380,-660) ; v1(700,-500) 744.09,-455.91 R8.1 744.09,-374.02 R9.2
  Bottom Layer w10: v1(380,-660) 440,-720 660,-720 700,-680 v1(700,-500)
NetR1_1: R1.1 U1.2 | length 580.1
  Top Layer w10: U1.2 -413.39,413.39 -433.07,433.07 -433.07,492.13 -192.91,732.28 R1.1
NetR3_1: R3.1 U1.6 | length 132.8
  Top Layer w10: R3.1 -468.5,212.6 -433.07,177.17 U1.6
NetR6_2: R6.2 U2.1 | length 109.6
  Top Layer w10: R6.2 553.15,352.36 U2.1 U2.1@604.33,352.36
RST: J1.5 R2.1 U1.15 | length 2068.6
  Top Layer w10: J1.5 -39.37,-708.66 311.02,-708.66 R2.1 ; U1.15 v1(452.76,295.28)
  Bottom Layer w10: J1.5 -98.43,19.68 177.17,295.28 v1(452.76,295.28)
RXD: J1.4 U1.11 | length 1305.4
  Top Layer w10: U1.11 v1(452.76,59.06)
  Bottom Layer w10: J1.4 -19.69,-98.43 137.8,59.06 v1(452.76,59.06)
TEMP: R7.1 TS.2 U1.10 | length 894.9
  Top Layer w10: U1.10 492.13,0 669.29,-177.17 787.4,-177.17 812.72,-151.85 812.72,-77.17 ; TS.2 812.72,-77.17 ; R7.1 812.72,-77.17
TOUCH: C15.2 pad.1 U2.3 | length 187.7
  Top Layer w10: U2.3 597.36,213.66 C15.2 614.17,102.36 pad.1
TXD: J1.3 U1.12 | length 1172.2
  Top Layer w10: U1.12 v1(452.76,118.11)
  Bottom Layer w10: J1.3 59.06,-393.7 482.76,30 482.76,88.11 v1(452.76,118.11)
pads on no net: D12.2 SW1.3 SW1.4 U1.5 U1.7 U1.17

## Keep-outs
Keep-Out Layer:
  lines w10: -1181.1,0 cw(c0,0) -1180.92,20.61 cw(c0,0) -1180.38,41.22 cw(c0,0) -1179.48,61.81 cw(c0,0) -1178.23,82.39 cw(c0,0) -1176.61,102.94 cw(c0,0) -1174.63,123.46 cw(c0,0) -1172.3,143.94 cw(c0,0) -1169.61,164.38 cw(c0,0) -1166.56,184.77 cw(c0,0) -1163.16,205.1 cw(c0,0) -1159.4,225.36 cw(c0,0) -1155.29,245.56 cw(c0,0) -1150.83,265.69 cw(c0,0) -1146.02,285.73 cw(c0,0) -1140.86,305.69 cw(c0,0) -1135.35,325.56 cw(c0,0) -1129.49,345.32 cw(c0,0) -1123.3,364.98 cw(c0,0) -1116.75,384.53 cw(c0,0) -1109.87,403.96 cw(c0,0) -1102.65,423.27 cw(c0,0) -1095.1,442.45 cw(c0,0) -1087.21,461.49 cw(c0,0) -1078.99,480.4 cw(c0,0) -1070.44,499.16 cw(c0,0) -1061.57,517.76 cw(c0,0) -1052.37,536.21 cw(c0,0) -1042.85,554.49 cw(c0,0) -1033.02,572.61 cw(c0,0) -1022.86,590.55 cw(c0,0) -1012.4,608.31 cw(c0,0) -1001.63,625.89 cw(c0,0) -990.56,643.27 cw(c0,0) -979.18,660.46 cw(c0,0) -967.5,677.45 cw(c0,0) -955.53,694.23 cw(c0,0) -943.27,710.81 cw(c0,0) -930.72,727.16 cw(c0,0) -917.89,743.29 cw(c0,0) -904.78,759.2 cw(c0,0) -891.39,774.87 cw(c0,0) -877.73,790.31 cw(c0,0) -863.8,805.51 cw(c0,0) -849.61,820.46 cw(c0,0) -835.17,835.17 cw(c0,0) -820.46,849.61 cw(c0,0) -805.51,863.8 cw(c0,0) -790.31,877.73 cw(c0,0) -774.87,891.39 cw(c0,0) -759.2,904.78 cw(c0,0) -743.29,917.89 cw(c0,0) -727.16,930.72 cw(c0,0) -710.81,943.27 cw(c0,0) -694.23,955.53 cw(c0,0) -677.45,967.5 cw(c0,0) -660.46,979.18 cw(c0,0) -643.27,990.56 cw(c0,0) -625.89,1001.63 cw(c0,0) -608.31,1012.4 cw(c0,0) -590.55,1022.86 cw(c0,0) -572.61,1033.02 cw(c0,0) -554.49,1042.85 cw(c0,0) -536.21,1052.37 cw(c0,0) -517.76,1061.57 cw(c0,0) -499.16,1070.44 cw(c0,0) -480.4,1078.99 cw(c0,0) -461.49,1087.21 cw(c0,0) -442.45,1095.1 cw(c0,0) -423.27,1102.65 cw(c0,0) -403.96,1109.87 cw(c0,0) -384.53,1116.75 cw(c0,0) -364.98,1123.3 cw(c0,0) -345.32,1129.49 cw(c0,0) -325.56,1135.35 cw(c0,0) -305.69,1140.86 cw(c0,0) -285.73,1146.02 cw(c0,0) -265.69,1150.83 cw(c0,0) -245.56,1155.29 cw(c0,0) -225.36,1159.4 cw(c0,0) -205.1,1163.16 cw(c0,0) -184.77,1166.56 cw(c0,0) -164.38,1169.61 cw(c0,0) -143.94,1172.3 cw(c0,0) -123.46,1174.63 cw(c0,0) -102.94,1176.61 cw(c0,0) -82.39,1178.23 cw(c0,0) -61.81,1179.48 cw(c0,0) -41.22,1180.38 cw(c0,0) -20.61,1180.92 cw(c0,0) 0,1181.1 cw(c0,0) 20.61,1180.92 cw(c0,0) 41.22,1180.38 cw(c0,0) 61.81,1179.48 cw(c0,0) 82.39,1178.23 cw(c0,0) 102.94,1176.61 cw(c0,0) 123.46,1174.63 cw(c0,0) 143.94,1172.3 cw(c0,0) 164.38,1169.61 cw(c0,0) 184.77,1166.56 cw(c0,0) 205.1,1163.16 cw(c0,0) 225.36,1159.4 cw(c0,0) 245.56,1155.29 cw(c0,0) 265.69,1150.83 cw(c0,0) 285.73,1146.02 cw(c0,0) 305.69,1140.86 cw(c0,0) 325.56,1135.35 cw(c0,0) 345.32,1129.49 cw(c0,0) 364.98,1123.3 cw(c0,0) 384.53,1116.75 cw(c0,0) 403.96,1109.87 cw(c0,0) 423.27,1102.65 cw(c0,0) 442.45,1095.1 cw(c0,0) 461.49,1087.21 cw(c0,0) 480.4,1078.99 cw(c0,0) 499.16,1070.44 cw(c0,0) 517.76,1061.57 cw(c0,0) 536.21,1052.37 cw(c0,0) 554.49,1042.85 cw(c0,0) 572.61,1033.02 cw(c0,0) 590.55,1022.86 cw(c0,0) 608.31,1012.4 cw(c0,0) 625.89,1001.63 cw(c0,0) 643.27,990.56 cw(c0,0) 660.46,979.18 cw(c0,0) 677.45,967.5 cw(c0,0) 694.23,955.53 cw(c0,0) 710.81,943.27 cw(c0,0) 727.16,930.72 cw(c0,0) 743.29,917.89 cw(c0,0) 759.2,904.78 cw(c0,0) 774.87,891.39 cw(c0,0) 790.31,877.73 cw(c0,0) 805.51,863.8 cw(c0,0) 820.46,849.61 cw(c0,0) 835.17,835.17 cw(c0,0) 849.61,820.46 cw(c0,0) 863.8,805.51 cw(c0,0) 877.73,790.31 cw(c0,0) 891.39,774.87 cw(c0,0) 904.78,759.2 cw(c0,0) 917.89,743.29 cw(c0,0) 930.72,727.16 cw(c0,0) 943.27,710.81 cw(c0,0) 955.53,694.23 cw(c0,0) 967.5,677.45 cw(c0,0) 979.18,660.46 cw(c0,0) 990.56,643.27 cw(c0,0) 1001.63,625.89 cw(c0,0) 1012.4,608.31 cw(c0,0) 1022.86,590.55 cw(c0,0) 1033.02,572.61 cw(c0,0) 1042.85,554.49 cw(c0,0) 1052.37,536.21 cw(c0,0) 1061.57,517.76 cw(c0,0) 1070.44,499.16 cw(c0,0) 1078.99,480.4 cw(c0,0) 1087.21,461.49 cw(c0,0) 1095.1,442.45 cw(c0,0) 1102.65,423.27 cw(c0,0) 1109.87,403.96 cw(c0,0) 1116.75,384.53 cw(c0,0) 1123.3,364.98 cw(c0,0) 1129.49,345.32 cw(c0,0) 1135.35,325.56 cw(c0,0) 1140.86,305.69 cw(c0,0) 1146.02,285.73 cw(c0,0) 1150.83,265.69 cw(c0,0) 1155.29,245.56 cw(c0,0) 1159.4,225.36 cw(c0,0) 1163.16,205.1 cw(c0,0) 1166.56,184.77 cw(c0,0) 1169.61,164.38 cw(c0,0) 1172.3,143.94 cw(c0,0) 1174.63,123.46 cw(c0,0) 1176.61,102.94 cw(c0,0) 1178.23,82.39 cw(c0,0) 1179.48,61.81 cw(c0,0) 1180.38,41.22 cw(c0,0) 1180.92,20.61 cw(c0,0) 1181.1,0 cw(c0,0) 1180.92,-20.61 cw(c0,0) 1180.38,-41.22 cw(c0,0) 1179.48,-61.81 cw(c0,0) 1178.23,-82.39 cw(c0,0) 1176.61,-102.94 cw(c0,0) 1174.63,-123.46 cw(c0,0) 1172.3,-143.94 cw(c0,0) 1169.61,-164.38 cw(c0,0) 1166.56,-184.77 cw(c0,0) 1163.16,-205.1 cw(c0,0) 1159.4,-225.36 cw(c0,0) 1155.29,-245.56 cw(c0,0) 1150.83,-265.69 cw(c0,0) 1146.02,-285.73 cw(c0,0) 1140.86,-305.69 cw(c0,0) 1135.35,-325.56 cw(c0,0) 1129.49,-345.32 cw(c0,0) 1123.3,-364.98 cw(c0,0) 1116.75,-384.53 cw(c0,0) 1109.87,-403.96 cw(c0,0) 1102.65,-423.27 cw(c0,0) 1095.1,-442.45 cw(c0,0) 1087.21,-461.49 cw(c0,0) 1078.99,-480.4 cw(c0,0) 1070.44,-499.16 cw(c0,0) 1061.57,-517.76 cw(c0,0) 1052.37,-536.21 cw(c0,0) 1042.85,-554.49 cw(c0,0) 1033.02,-572.61 cw(c0,0) 1022.86,-590.55 cw(c0,0) 1012.4,-608.31 cw(c0,0) 1001.63,-625.89 cw(c0,0) 990.56,-643.27 cw(c0,0) 979.18,-660.46 cw(c0,0) 967.5,-677.45 cw(c0,0) 955.53,-694.23 cw(c0,0) 943.27,-710.81 cw(c0,0) 930.72,-727.16 cw(c0,0) 917.89,-743.29 cw(c0,0) 904.78,-759.2 cw(c0,0) 891.39,-774.87 cw(c0,0) 877.73,-790.31 cw(c0,0) 863.8,-805.51 cw(c0,0) 849.61,-820.46 cw(c0,0) 835.17,-835.17 cw(c0,0) 820.46,-849.61 cw(c0,0) 805.51,-863.8 cw(c0,0) 790.31,-877.73 cw(c0,0) 774.87,-891.39 cw(c0,0) 759.2,-904.78 cw(c0,0) 743.29,-917.89 cw(c0,0) 727.16,-930.72 cw(c0,0) 710.81,-943.27 cw(c0,0) 694.23,-955.53 cw(c0,0) 677.45,-967.5 cw(c0,0) 660.46,-979.18 cw(c0,0) 643.27,-990.56 cw(c0,0) 625.89,-1001.63 cw(c0,0) 608.31,-1012.4 cw(c0,0) 590.55,-1022.86 cw(c0,0) 572.61,-1033.02 cw(c0,0) 554.49,-1042.85 cw(c0,0) 536.21,-1052.37 cw(c0,0) 517.76,-1061.57 cw(c0,0) 499.16,-1070.44 cw(c0,0) 480.4,-1078.99 cw(c0,0) 461.49,-1087.21 cw(c0,0) 442.45,-1095.1 cw(c0,0) 423.27,-1102.65 cw(c0,0) 403.96,-1109.87 cw(c0,0) 384.53,-1116.75 cw(c0,0) 364.98,-1123.3 cw(c0,0) 345.32,-1129.49 cw(c0,0) 325.56,-1135.35 cw(c0,0) 305.69,-1140.86 cw(c0,0) 285.73,-1146.02 cw(c0,0) 265.69,-1150.83 cw(c0,0) 245.56,-1155.29 cw(c0,0) 225.36,-1159.4 cw(c0,0) 205.1,-1163.16 cw(c0,0) 184.77,-1166.56 cw(c0,0) 164.38,-1169.61 cw(c0,0) 143.94,-1172.3 cw(c0,0) 123.46,-1174.63 cw(c0,0) 102.94,-1176.61 cw(c0,0) 82.39,-1178.23 cw(c0,0) 61.81,-1179.48 cw(c0,0) 41.22,-1180.38 cw(c0,0) 20.61,-1180.92 cw(c0,0) 0,-1181.1 cw(c0,0) -20.61,-1180.92 cw(c0,0) -41.22,-1180.38 cw(c0,0) -61.81,-1179.48 cw(c0,0) -82.39,-1178.23 cw(c0,0) -102.94,-1176.61 cw(c0,0) -123.46,-1174.63 cw(c0,0) -143.94,-1172.3 cw(c0,0) -164.38,-1169.61 cw(c0,0) -184.77,-1166.56 cw(c0,0) -205.1,-1163.16 cw(c0,0) -225.36,-1159.4 cw(c0,0) -245.56,-1155.29 cw(c0,0) -265.69,-1150.83 cw(c0,0) -285.73,-1146.02 cw(c0,0) -305.69,-1140.86 cw(c0,0) -325.56,-1135.35 cw(c0,0) -345.32,-1129.49 cw(c0,0) -364.98,-1123.3 cw(c0,0) -384.53,-1116.75 cw(c0,0) -403.96,-1109.87 cw(c0,0) -423.27,-1102.65 cw(c0,0) -442.45,-1095.1 cw(c0,0) -461.49,-1087.21 cw(c0,0) -480.4,-1078.99 cw(c0,0) -499.16,-1070.44 cw(c0,0) -517.76,-1061.57 cw(c0,0) -536.21,-1052.37 cw(c0,0) -554.49,-1042.85 cw(c0,0) -572.61,-1033.02 cw(c0,0) -590.55,-1022.86 cw(c0,0) -608.31,-1012.4 cw(c0,0) -625.89,-1001.63 cw(c0,0) -643.27,-990.56 cw(c0,0) -660.46,-979.18 cw(c0,0) -677.45,-967.5 cw(c0,0) -694.23,-955.53 cw(c0,0) -710.81,-943.27 cw(c0,0) -727.16,-930.72 cw(c0,0) -743.29,-917.89 cw(c0,0) -759.2,-904.78 cw(c0,0) -774.87,-891.39 cw(c0,0) -790.31,-877.73 cw(c0,0) -805.51,-863.8 cw(c0,0) -820.46,-849.61 cw(c0,0) -835.17,-835.17 cw(c0,0) -849.61,-820.46 cw(c0,0) -863.8,-805.51 cw(c0,0) -877.73,-790.31 cw(c0,0) -891.39,-774.87 cw(c0,0) -904.78,-759.2 cw(c0,0) -917.89,-743.29 cw(c0,0) -930.72,-727.16 cw(c0,0) -943.27,-710.81 cw(c0,0) -955.53,-694.23 cw(c0,0) -967.5,-677.45 cw(c0,0) -979.18,-660.46 cw(c0,0) -990.56,-643.27 cw(c0,0) -1001.63,-625.89 cw(c0,0) -1012.4,-608.31 cw(c0,0) -1022.86,-590.55 cw(c0,0) -1033.02,-572.61 cw(c0,0) -1042.85,-554.49 cw(c0,0) -1052.37,-536.21 cw(c0,0) -1061.57,-517.76 cw(c0,0) -1070.44,-499.16 cw(c0,0) -1078.99,-480.4 cw(c0,0) -1087.21,-461.49 cw(c0,0) -1095.1,-442.45 cw(c0,0) -1102.65,-423.27 cw(c0,0) -1109.87,-403.96 cw(c0,0) -1116.75,-384.53 cw(c0,0) -1123.3,-364.98 cw(c0,0) -1129.49,-345.32 cw(c0,0) -1135.35,-325.56 cw(c0,0) -1140.86,-305.69 cw(c0,0) -1146.02,-285.73 cw(c0,0) -1150.83,-265.69 cw(c0,0) -1155.29,-245.56 cw(c0,0) -1159.4,-225.36 cw(c0,0) -1163.16,-205.1 cw(c0,0) -1166.56,-184.77 cw(c0,0) -1169.61,-164.38 cw(c0,0) -1172.3,-143.94 cw(c0,0) -1174.63,-123.46 cw(c0,0) -1176.61,-102.94 cw(c0,0) -1178.23,-82.39 cw(c0,0) -1179.48,-61.81 cw(c0,0) -1180.38,-41.22 cw(c0,0) -1180.92,-20.61 cw(c0,0) -1181.1,0

## Silkscreen, mask and mechanical layers (free items; w line width, h text height)
Top Overlay:
  circle w10: c610.24,98.43 r44.02
  lines w10: -423.23,-374.02 -177.17,-374.02 ; -423.23,-216.54 -177.17,-216.54 ; -423.23,-59.06 -177.17,-59.06 -177.17,-374.02
  text "TOUCH" at 472.44,-118.11 h40 r51.34
  text "GND" at -374.02,-157.48 h60
  text "5V" at -354.33,-354.33 h60

## Text inside footprints (layer, text, board x,y; h text height)
J1: Top Overlay "+   -   Tx  Rx Res IO0" at 236.54,-701.72 h20 r180